# EAGLE board MyQ GDO (EAGLE 9.6.2), part 1 of 2
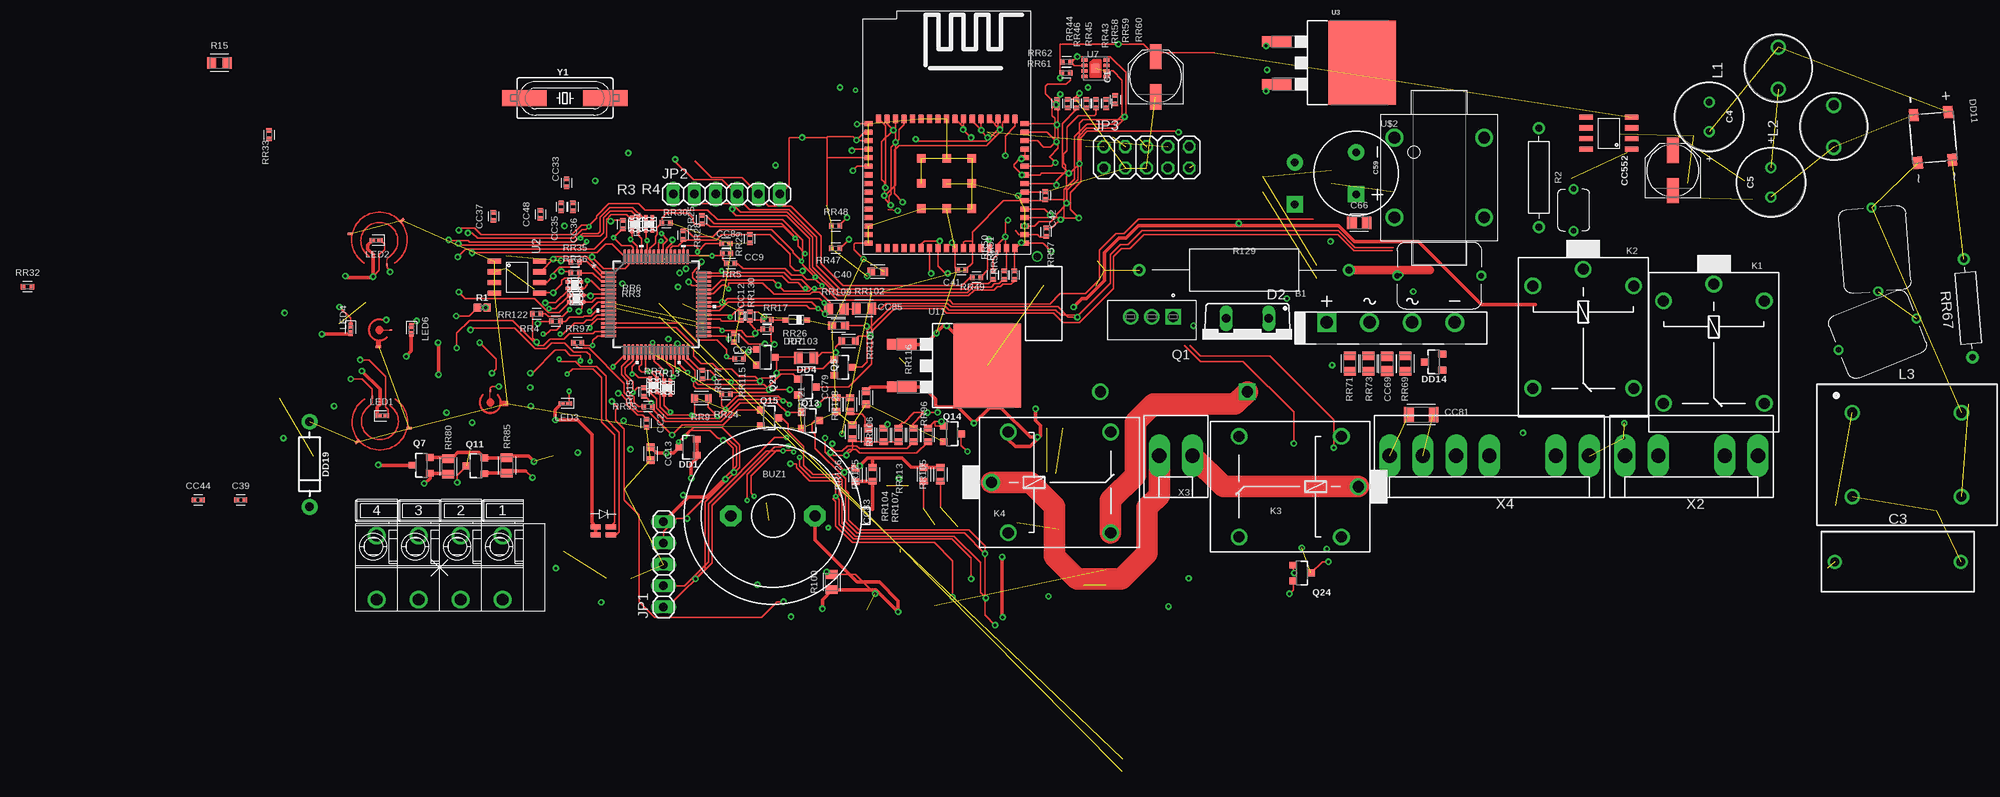
[diagram p0: board, top side]
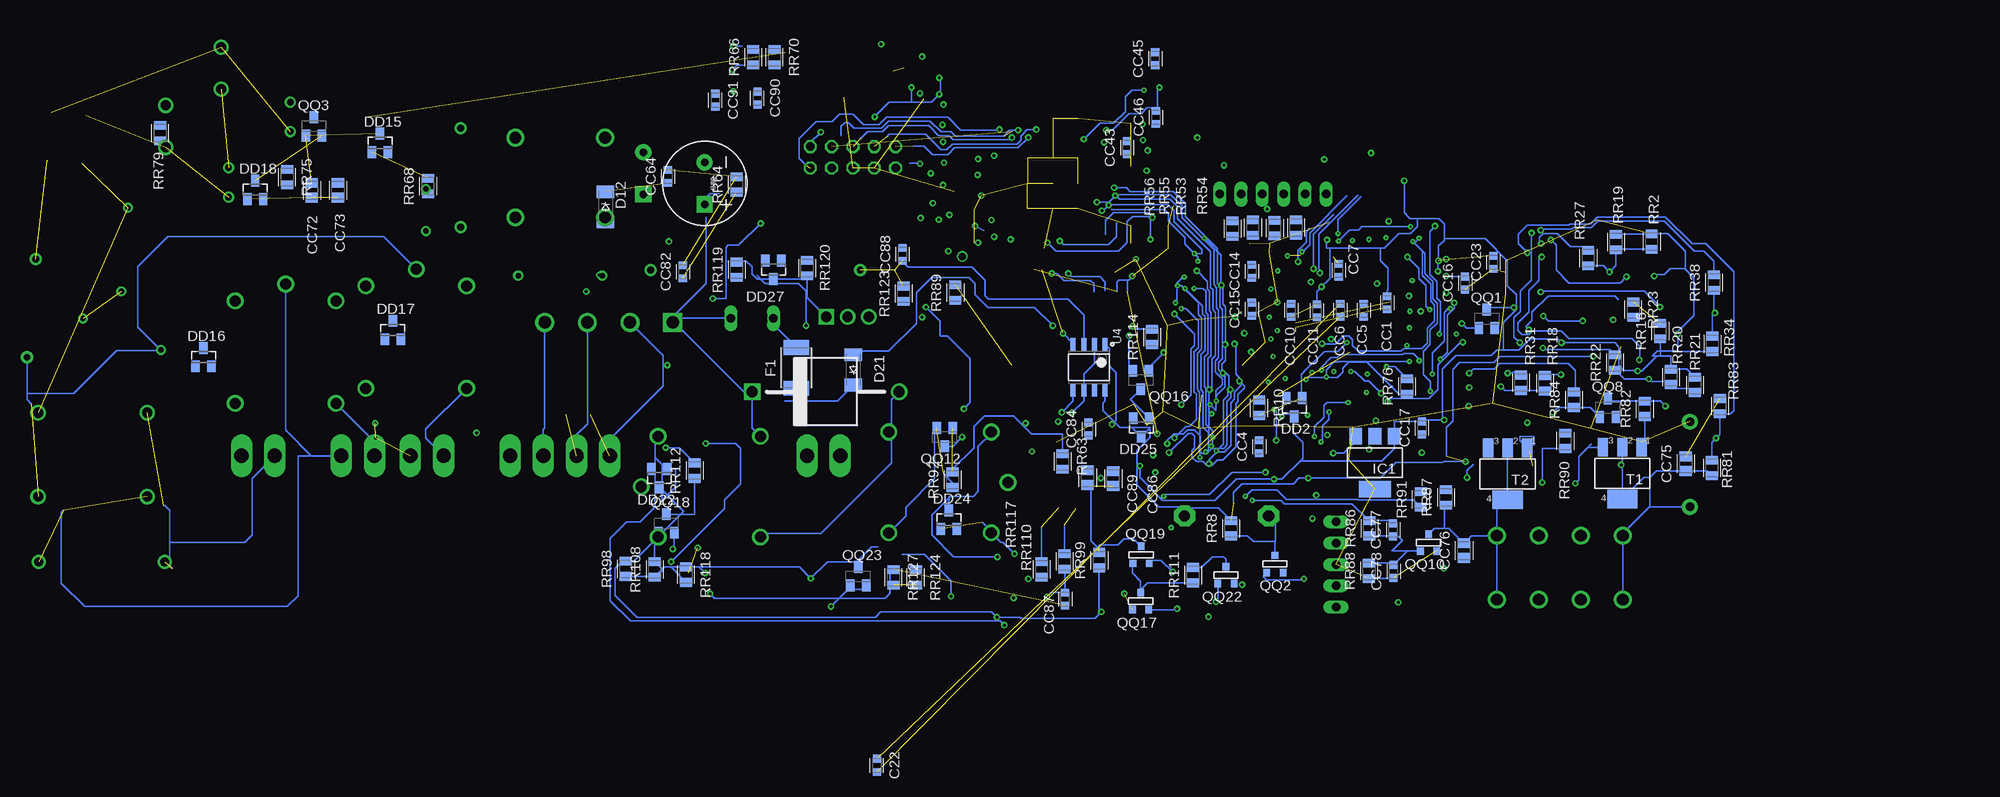
[diagram p1: board, bottom side, seen from below]

No outline drawn. Coordinates in mm, seen from the top.
Copper layers (1*16): Top 0.035mm / dielectric 1.5mm / Bottom 0.035mm
Design rules "default": minimum track width 6mil, minimum drill 0.35mm, track to track 6mil, track to pad 6mil, pad to pad 6mil, via to via 6mil, smd to smd 6mil, copper to edge 40mil, drill to drill 6mil, minimum pad ring 10mil, minimum via ring 8mil, stop-mask expansion 4mil, vias tented up to drill 0mil, thermal gap 10mil
Net classes: 0 default: width 0.152 mm

## Footprints (pad centres in the part's own frame; a part is rotated, then mirrored left to right if it is on the bottom)
GBU1002 = drill 1.499 square: + -7.62,0 | drill 1.499: - 7.62,0; AC1 -2.54,0; AC2 2.54,0
F/EE21P = drill 1.321 pad 2.54 octagon: 1 -5.004,0; 2 5.004,0
PANASONIC_D = smd 3 x 1.4: + 2.4,0; - -2.4,0
WCAP-FTBP_15X18X7X13(PXLXWXH) = drill 1.1: 1 -7.5,0; 2 7.5,0
WCAP-ATG8_8X16(DXL) = drill 0.8: 1 1.75,0; 2 -1.75,0
CAPC1608X85 = smd 0.921 x 0.97: 1 -0.775,0; 2 0.775,0
CAPC1005X60 = smd 0.56 x 0.629: 1 -0.485,0; 2 0.485,0
CPOL-RADIAL-5MM-10MM = drill 0.9 pad 1.93 square: + 2.5,0 | drill 0.9 pad 1.93: - -2.5,0
CAPC2012X110 = smd 1.165 x 1.465: 1 -0.875,0; 2 0.875,0
THROUGH-HOLE_10MM = drill 0.65: P$1 -5,0; P$2 5,0
THROUGH-HOLE_5MM = drill 0.65: P$1 -2.5,0; P$2 2.5,0
CAPC3216X135 = smd 1.165 x 1.815: 1 -1.475,0; 2 1.475,0
0805_SMD_BICOLOR_LED = smd 1.2 x 0.6: P$1 0.9,0.475; P$2 -0.9,0.475; P$3 -0.9,-0.475; P$4 0.9,-0.475
DO220S = drill 1.016 long: A 2.54,-2.54; C -2.54,-2.54
SOD-123_MINI-SMA = smd 1.5 x 2.1: A 1.8,0; C -1.8,0
SOT23-3 = smd 0.8 x 0.9: 1 -0.95,-1; 2 0.95,-1; 3 0,1.1
SOT23 = smd 1 x 1.4: 1 -0.95,-1.1; 2 0.95,-1.1; 3 0,1.1
SOD323_ST = smd 0.8 x 0.6: A 1.25,0; C -1.25,0
SMD = smd 1.5 x 1.1: 1 -2.86,2.05; 2 2.86,2.05; 3 2.86,-2.05; 4 -2.86,-2.05
DIODE-1N4001-KIT = drill 1.016 pad 1.88: A -5.08,0; C 5.08,0
1.2_AXIAL_WIDE = drill 1.321: P$1 -8.75,0 | drill 1.321 square: P$2 8.75,0
FUSC4632X160 = smd 1.73 x 3.05: 1 -2.415,0; 2 2.415,0
SOT223 = smd 1.5 x 2: 1 -2.3,-3.15; 2 0,-3.15; 3 2.3,-3.15 | smd 3.8 x 2: 4 0,3.15
5.0MM_4TERM = drill 1.4: P$0_1 -7.5,3.81; P$0_2 -2.5,3.81; P$0_3 2.5,3.81; P$0_4 7.5,3.81; P$1_1 -7.5,-3.81; P$1_2 -2.5,-3.81; P$1_3 2.5,-3.81; P$1_4 7.5,-3.81
1X05 = drill 1.016 long: 1 -5.08,0; 2 -2.54,0; 3 0,0; 4 2.54,0; 5 5.08,0
1X06 = drill 1.016 long: 1 -6.35,0; 2 -3.81,0; 3 -1.27,0; 4 1.27,0; 5 3.81,0; 6 6.35,0
2X05 = drill 1.016 octagon: 1 -5.08,-1.27; 2 -5.08,1.27; 3 -2.54,-1.27; 4 -2.54,1.27; 5 0,-1.27; 6 0,1.27; 7 2.54,-1.27; 8 2.54,1.27; 9 5.08,-1.27; 10 5.08,1.27
HF3FA = drill 1.321: 1 -7.525,-6; 2 -7.525,6; O 4.675,6; P -9.525,0; S 4.676,-6
WE-TIS_8075 = drill 1.2: 1 -2.5,0; 2 2.5,0
WE-FC_UT20V = drill 1.2: 1 -6.5,5; 2 -6.5,-5; 3 6.5,-5; 4 6.5,5
LEDC1005X25N_FLAT-R = smd 0.7 x 0.5: A 0.45,0; C -0.45,0
TO-220 = drill 1.23 pad 1.85: D 2.54,0; S 5.08,0 | drill 1.23 pad 1.85 square: G 0,0
SOT23-BEC = smd 1 x 1.4: B -0.95,-1.1; C 0,1.1; E 0.95,-1.1
SOT-23 = smd 0.787 x 0.889: 1 0.025,-1.016; 2 -0.94,1.016; 3 0.991,1.016
0402 = smd 0.85 x 0.9: 1 -0.58,0; 2 0.58,0
RESAD1176W63L850D250B = drill 0.83 pad 1.43: 1 -5.88,0; 2 5.88,0
SMD_ARRAY_1.6X2.0 = smd 0.43 x 0.65: P$1 -0.385,-0.725; P$2 -0.385,0.725; P$3 0.385,0.725; P$4 0.385,-0.725
RESC2012X65 = smd 1.031 x 1.42: 1 -0.919,0; 2 0.919,0
RESAD1176W63L850D250B' = drill 0.83 pad 1.43: 1 -12.5,0; 2 12.5,0
RESC1005X40 = smd 0.535 x 0.644: 1 -0.507,0; 2 0.507,0
RESC1608X60 = smd 0.799 x 0.974: 1 -0.815,0; 2 0.815,0
CAP_TOUCH_PAD = smd 0.152 x 0.305: P$1 -0.9,2.9 | smd 0.61 x 0.305 rotated 45: P$2 -2.7,-2.4 | smd 0.61 x 0.305: P$3 3.5,-0.8
CAP_TOUCH_PAD2 = smd 0.152 x 0.305: P$1 0,1.397 | smd 0.305 x 0.61: P$2 1.999,-0.114
SOT223' = smd 1.219 x 2.235: 1 -2.311,-3.099; 2 0,-3.099; 3 2.311,-3.099 | smd 3.6 x 2.2: 4 0,3.099
TQFP64_10X10MC_MCH-M = smd 1.778 x 0.279: 1 -5.664,3.75; 2 -5.664,3.25; 3 -5.664,2.75; 4 -5.664,2.25; 5 -5.664,1.75; 6 -5.664,1.25; 7 -5.664,0.75; 8 -5.664,0.25; 9 -5.664,-0.25; 10 -5.664,-0.75; 11 -5.664,-1.25; 12 -5.664,-1.75; 13 -5.664,-2.25; 14 -5.664,-2.75; 15 -5.664,-3.25; 16 -5.664,-3.75; 33 5.664,-3.75; 34 5.664,-3.25; 35 5.664,-2.75; 36 5.664,-2.25; 37 5.664,-1.75; 38 5.664,-1.25; 39 5.664,-0.75; 40 5.664,-0.25; 41 5.664,0.25; 42 5.664,0.75; 43 5.664,1.25; 44 5.664,1.75; 45 5.664,2.25; 46 5.664,2.75; 47 5.664,3.25; 48 5.664,3.75 | smd 0.279 x 1.778: 17 -3.75,-5.664; 18 -3.25,-5.664; 19 -2.75,-5.664; 20 -2.25,-5.664; 21 -1.75,-5.664; 22 -1.25,-5.664; 23 -0.75,-5.664; 24 -0.25,-5.664; 25 0.25,-5.664; 26 0.75,-5.664; 27 1.25,-5.664; 28 1.75,-5.664; 29 2.25,-5.664; 30 2.75,-5.664; 31 3.25,-5.664; 32 3.75,-5.664; 49 3.75,5.664; 50 3.25,5.664; 51 2.75,5.664; 52 2.25,5.664; 53 1.75,5.664; 54 1.25,5.664; 55 0.75,5.664; 56 0.25,5.664; 57 -0.25,5.664; 58 -0.75,5.664; 59 -1.25,5.664; 60 -1.75,5.664; 61 -2.25,5.664; 62 -2.75,5.664; 63 -3.25,5.664; 64 -3.75,5.664
SOIC-8 = smd 0.61 x 1.6: P$1 -1.905,-2.7; P$2 -0.635,-2.7; P$3 0.635,-2.7; P$4 1.905,-2.7; P$5 1.905,2.7; P$6 0.635,2.7; P$7 -0.635,2.7; P$8 -1.905,2.7
TO-263/D2PAK = smd 1.25 x 3.5: 1 -2.54,-7.045; 3 2.54,-7.045 | smd 10 x 8: 2 0,3.125
ON_SEMICONDUCTOR_LM258D_0 = smd 1.52 x 0.6: 1 -2.74,1.905; 2 -2.74,0.635; 3 -2.74,-0.635; 4 -2.74,-1.905; 5 2.74,-1.905; 6 2.74,-0.635; 7 2.74,0.635; 8 2.74,1.905
TDFN8-3X3MM = smd 0.7 x 0.4: 1 -1.3,0.975; 2 -1.3,0.325; 3 -1.3,-0.325; 4 -1.3,-0.975; 5 1.3,-0.975; 6 1.3,-0.325; 7 1.3,0.325; 8 1.3,0.975 | smd 1 x 1: TH 0,0
CHAMBERLAIN_HBW8522 = smd 0.6 x 1: P$1 8.128,1.6; P$2 7.112,1.6; P$3 6.096,1.6; P$4 5.08,1.6; P$5 4.064,1.6; P$6 3.048,1.6; P$7 2.032,1.6; P$8 1.016,1.6; P$9 0,1.6; P$10 -1.016,1.6; P$11 -2.032,1.6; P$12 -3.048,1.6; P$13 -4.064,1.6; P$14 -5.08,1.6; P$15 -6.096,1.6; P$16 -7.112,1.6; P$17 -8.128,1.6; P$33 -8.128,-13.8; P$34 -7.112,-13.8; P$35 -6.096,-13.8; P$36 -5.08,-13.8; P$37 -4.064,-13.8; P$38 -3.048,-13.8; P$39 -2.032,-13.8; P$40 -1.016,-13.8; P$41 0,-13.8; P$42 1.016,-13.8; P$43 2.032,-13.8; P$44 3.048,-13.8; P$45 4.064,-13.8; P$46 5.08,-13.8; P$47 6.096,-13.8; P$48 7.112,-13.8; P$49 8.128,-13.8 | smd 1 x 0.6: P$18 -9.3,1.012; P$19 -9.3,-0.004; P$20 -9.3,-1.02; P$21 -9.3,-2.036; P$22 -9.3,-3.052; P$23 -9.3,-4.068; P$24 -9.3,-5.084; P$25 -9.3,-6.1; P$26 -9.3,-7.116; P$27 -9.3,-8.132; P$28 -9.3,-9.148; P$29 -9.3,-10.164; P$30 -9.3,-11.18; P$31 -9.3,-12.196; P$32 -9.3,-13.212; P$50 9.3,-13.212; P$51 9.3,-12.196; P$52 9.3,-11.18; P$53 9.3,-10.164; P$54 9.3,-9.148; P$55 9.3,-8.132; P$56 9.3,-7.116; P$57 9.3,-6.1; P$58 9.3,-5.084; P$59 9.3,-4.068; P$60 9.3,-3.052; P$61 9.3,-2.036; P$62 9.3,-1.02; P$63 9.3,-0.004; P$64 9.3,1.012 | smd 1.016 x 1.016: P$65 3,-3.1; P$66 0,-3.1; P$67 -3,-3.1; P$68 3,-6.1; P$69 0,-6.1; P$70 -3,-6.1; P$71 3,-9.1; P$72 0,-9.1; P$73 -3,-9.1
TRANSFORMER = drill 1.4: 1 -5.35,4.75; 2 -5.35,-4.75; 3 5.35,-4.75; 4 5.35,4.75
KK-156-5-MOD = drill 1.7 pad 2.184 long: 1 -7.92,0; 2 -3.96,0; 4 3.96,0; 5 7.92,0
KK-156-2 = drill 1.7 pad 2.184 long: 1 -1.98,0; 2 1.98,0
KK-156-7-MOD = drill 1.7 pad 2.184 long: 1 -11.88,0; 2 -7.92,0; 4 0,0; 5 3.96,0; 6 7.92,0; 7 11.88,0
HC49UP = smd 5.334 x 1.93: 1 -4.826,0; 2 4.826,0

## Placement (x,y rotation side)
B1  [GBU1002]  92.52,92.27 0 top
BUZ1  F/EE21P  [F/EE21P]  18.92,69.22 0 top
C1  100uF  [PANASONIC_D]  64.52,121.54 90 top
C3  330 nF  [WCAP-FTBP_15X18X7X13(PXLXWXH)]  152.91,63.75 0 top
C4  680 µF  [WCAP-ATG8_8X16(DXL)]  130.43,116.78 270 top
C5  680 µF  [WCAP-ATG8_8X16(DXL)]  137.79,108.97 90 top
C22  [CAPC1608X85]  60.58,39.5 270 bottom
C39  [CAPC1005X60]  -44.45,71.12 0 top
C40  [CAPC1608X85]  31.43,98.3 0 top
C41  [CAPC1005X60]  41.4,98.55 0 top
C42  [CAPC1005X60]  51.37,107.38 90 top
C59  1mF  [CPOL-RADIAL-5MM-10MM]  88.39,110.05 270 top
C66  [CAPC2012X110]  88.77,104.14 0 top
C80  1mF  [CPOL-RADIAL-5MM-10MM]  81.09,108.84 270 bottom
CC1  [CAPC1608X85]  -0.19,94.61 90 bottom
CC2  [CAPC1005X60]  3.87,80.26 270 top
CC3  [CAPC1005X60]  14.29,90.42 270 top
CC4  [CAPC1608X85]  15.05,77.47 90 bottom
CC5  [CAPC1608X85]  2.6,93.73 90 bottom
CC6  [CAPC1608X85]  5.4,93.73 90 bottom
CC7  [CAPC1608X85]  5.59,98.49 90 bottom
CC8  [CAPC1005X60]  13.34,101.66 0 top
CC9  [CAPC1005X60]  13.4,100.52 0 top
CC10  [CAPC1608X85]  11.24,93.73 90 bottom
CC11  [CAPC1608X85]  8.19,93.66 90 bottom
CC12  [CAPC1005X60]  15.11,93.03 270 top
CC13  [CAPC1608X85]  4.38,76.64 270 top
CC14  [CAPC1608X85]  15.94,98.36 90 bottom
CC15  [CAPC1608X85]  15.94,93.85 90 bottom
CC16  [CAPC1608X85]  -9.46,96.96 90 bottom
CC17  [CAPC1608X85]  -4.32,79.69 90 bottom
CC23  [CAPC1608X85]  -12.83,99.44 90 bottom
CC33  [CAPC1005X60]  -5.65,108.9 90 top
CC35  [CAPC1005X60]  -6.29,106.05 90 top
CC36  [CAPC1005X60]  -4.89,106.05 90 top
CC37  [CAPC1005X60]  -14.35,104.9 90 top
CC43  [CAPC1608X85]  30.8,113.09 90 bottom
CC44  [CAPC1005X60]  -49.53,71.12 0 top
CC45  [CAPC1608X85]  27.43,123.7 90 bottom
CC46  [CAPC1608X85]  27.37,116.71 90 bottom
CC47  CAPACITOR_HIGH_VOLTAGE_CERAMIC10MM_LEAD_SPACING  [THROUGH-HOLE_10MM]  150.18,100.97 94.5 top
CC48  [CAPC1005X60]  -8.76,105.16 90 top
CC52  CAPACITOR_HIGH_VOLTAGE_CERAMIC5.0MM_LEAD_SPACING  [THROUGH-HOLE_5MM]  114.3,105.66 90 top
CC53  CAPACITOR_HIGH_VOLTAGE_CERAMIC10MM_LEAD_SPACING  [THROUGH-HOLE_10MM]  150.5,90.87 22 top
CC64  [CAPC1608X85]  85.47,109.66 90 bottom
CC69  [CAPC2012X110]  92.08,87.38 90 top
CC70  CAPACITOR_HIGH_VOLTAGE_CERAMIC10MM_LEAD_SPACING  [THROUGH-HOLE_10MM]  98.3,97.85 0 top
CC72  [CAPC2012X110]  127.89,108.01 90 bottom
CC73  [CAPC2012X110]  124.78,108.01 90 bottom
CC75  [CAPC2012X110]  -35.75,75.44 90 bottom
CC76  [CAPC2012X110]  -9.33,65.09 90 bottom
CC77  [CAPC1608X85]  -0.89,67.56 90 bottom
CC78  [CAPC1608X85]  -0.95,62.61 90 bottom
CC79  [CAPC1608X85]  30.04,83.31 270 top
CC81  [CAPC3216X135]  96.14,81.28 0 top
CC82  [CAPC1608X85]  83.69,98.3 90 bottom
CC83  [CAPC1608X85]  30.29,78.87 270 top
CC84  [CAPC1608X85]  35.37,79.57 90 bottom
CC85  [CAPC1608X85]  26.73,91.88 0 top
CC86  [CAPC2012X110]  32.45,73.66 90 bottom
CC87  [CAPC1608X85]  38.16,59.31 90 bottom
CC88  [CAPC1608X85]  57.53,100.39 90 bottom
CC89  [CAPC2012X110]  35.5,73.79 90 bottom
CC90  [CAPC1608X85]  74.8,119 270 bottom
CC91  [CAPC1608X85]  79.82,118.75 270 bottom
CC552  100uF  [PANASONIC_D]  126.11,110.36 90 top
D1  LED_0805_BICOLOR  [0805_SMD_BICOLOR_LED]  -1.27,67.44 180 top
D2  [DO220S]  75.44,90.23 180 top
D12  CGRM4003-G  [SOD-123_MINI-SMA]  92.9,106.05 270 bottom
D21  CGRM4003-G  [SOD-123_MINI-SMA]  63.37,86.61 90 bottom
DD1  [SOT23-3]  8.89,77.41 90 top
DD2  BAS40  [SOT23]  10.86,82.17 180 bottom
DD4  [SOT23-3]  22.92,84.58 270 top
DD7  [SOD323_ST]  21.72,92.58 180 top
DD11  [SMD]  157.1,114.3 275 top
DD14  [SOT23-3]  97.66,87.57 90 top
DD15  BAS40  [SOT23]  119.76,113.67 0 bottom
DD16  BAS40  [SOT23]  140.78,88.14 0 bottom
DD17  BAS40  [SOT23]  118.24,91.38 0 bottom
DD18  BAS40  [SOT23]  134.62,108.08 0 bottom
DD19  1A/50V/1.1V  [DIODE-1N4001-KIT]  -36.26,75.37 270 top
DD22  BAS40  [SOT23]  86.49,73.72 180 bottom
DD24  BAS40  [SOT23]  52.01,68.77 0 bottom
DD25  BAS40  [SOT23]  29.08,79.76 180 bottom
DD26  600V_DIODE  [1.2_AXIAL_WIDE]  66.67,84.01 180 bottom
DD27  BAS40  [SOT23]  72.9,98.55 180 bottom
F1  MF-MSMF-STYLE2_1  [FUSC4632X160]  70.17,86.87 90 bottom
IC1  LD117AS18TR  [SOT223]  1.27,75.56 180 bottom
J1  HSTA_5.0MM_VERT-4TERM  [5.0MM_4TERM]  -20.76,63.06 180 top
JP1  PINHD-1X5  [1X05]  5.91,63.44 90 top
JP2  PINHD-1X6  [1X06]  13.4,107.57 0 top
JP3  [2X05]  63.44,111.95 0 top
K1  HF3FA  [HF3FA]  131,87.31 270 top
K2  HF3FA  [HF3FA]  115.44,89.09 270 top
K3  HF3FA  [HF3FA]  79.12,72.71 180 top
K4  HF3FA  [HF3FA]  54.48,73.22 0 top
L1  3300uH  [WE-TIS_8075]  138.68,122.56 90 top
L2  3300uH  [WE-TIS_8075]  145.29,115.63 90 top
L3  2.7mH  [WE-FC_UT20V]  153.99,76.52 0 top
LED1  LED_RED  [LEDC1005X25N_FLAT-R]  -27.56,81.15 0 top
LED2  LED_RED  [LEDC1005X25N_FLAT-R]  -28.32,102.04 180 top
LED3  LED_RED  [LEDC1005X25N_FLAT-R]  -5.78,82.61 180 top
LED4  LED_RED  [LEDC1005X25N_FLAT-R]  -31.37,91.44 270 top
LED6  LED_RED  [LEDC1005X25N_FLAT-R]  -24.13,91.38 270 top
Q1  IRF520NPBF  [TO-220]  66.61,92.96 180 top
Q5  [SOT23-3]  27.24,86.93 270 top
Q7  K2F Marking  [SOT23-3]  -22.92,75.25 90 top
Q11  K2F Marking  [SOT23-3]  -16.45,75.18 90 top
Q13  [SOT23-3]  23.37,80.58 270 top
Q14  [SOT23-3]  40.26,78.99 270 top
Q15  [SOT23-3]  18.48,80.9 270 top
Q21  [SOT23-3]  18.03,88.14 270 top
Q24  [SOT23-3]  81.92,62.42 270 top
QQ1  [SOT23-BEC]  -12.06,92.71 0 bottom
QQ2  PNP_SOT23  [SOT-23]  13.14,63.5 180 bottom
QQ3  [SOT23-BEC]  127.64,115.63 0 bottom
QQ8  [SOT23-BEC]  -26.48,82.11 0 bottom
QQ10  PNP_SOT23  [SOT-23]  -5.14,66.04 180 bottom
QQ12  [SOT23-BEC]  52.51,78.61 180 bottom
QQ16  [SOT23-BEC]  29.15,85.41 180 bottom
QQ17  -NPN  [SOT-23]  29.15,59.05 180 bottom
QQ18  [SOT23-BEC]  85.66,68.33 0 bottom
QQ19  -NPN  [SOT-23]  29.08,64.58 180 bottom
QQ22  PNP_SOT23  [SOT-23]  18.99,62.17 180 bottom
QQ23  [SOT23-BEC]  62.8,62.04 0 bottom
R1  [0402]  -15.68,94.04 0 top
R2  [RESAD1176W63L850D250B]  110.17,109.54 270 top
R3  SMD_RES_ARRAY_X2  [SMD_ARRAY_1.6X2.0]  2.54,103.95 0 top
R4  SMD_RES_ARRAY_X2  [SMD_ARRAY_1.6X2.0]  4.19,104.01 0 top
R15  [RESC2012X65]  -46.99,123.19 0 top
R100  [RESC2012X65]  25.91,61.34 90 top
R129  [RESAD1176W63L850D250B']  75.06,98.49 0 top
RR2  [RESC2012X65]  -31.69,101.92 90 bottom
RR3  SMD_RES_ARRAY_X2  [SMD_ARRAY_1.6X2.0]  -4.51,95.12 270 top
RR4  [RESC1005X40]  -6.92,92.39 0 top
RR5  [RESC1005X40]  13.91,99.31 180 top
RR6  SMD_RES_ARRAY_X2  [SMD_ARRAY_1.6X2.0]  -4.7,96.71 270 top
RR7  SMD_RES_ARRAY_X2  [SMD_ARRAY_1.6X2.0]  4.7,84.77 0 top
RR8  [RESC2012X65]  18.41,67.75 90 bottom
RR9  [RESC1608X60]  10.41,83.25 0 top
RR10  [RESC2012X65]  15.05,82.11 270 bottom
RR11  [RESC1005X40]  1.08,103.95 270 top
RR13  SMD_RES_ARRAY_X2  [SMD_ARRAY_1.6X2.0]  6.35,84.52 0 top
RR15  [RESC1005X40]  3.56,84.01 90 top
RR16  [RESC2012X65]  -32.7,91.25 90 bottom
RR17  [RESC1005X40]  18.22,92.58 0 top
RR18  [RESC2012X65]  -18.99,85.03 90 bottom
RR19  [RESC2012X65]  -27.43,101.85 90 bottom
RR20  [RESC2012X65]  -33.97,85.79 90 bottom
RR21  [RESC2012X65]  -36.83,84.84 90 bottom
RR22  [RESC2012X65]  -27.3,87.5 90 bottom
RR23  [RESC2012X65]  -29.53,93.79 270 bottom
RR24  [RESC1005X40]  13.34,83.69 0 top
RR25  330R  [RESC1005X40]  10.48,104.52 270 top
RR26  [RESC1005X40]  18.22,91.44 0 top
RR27  [RESC2012X65]  -24.13,99.95 90 bottom
RR28  330R  [RESC1005X40]  8.26,102.68 270 top
RR29  [RESC1005X40]  16.19,102.23 270 top
RR30  83K  [RESC1005X40]  6.22,104.14 0 top
RR31  [RESC2012X65]  -16.13,85.09 90 bottom
RR32  [RESC1005X40]  -69.85,96.52 0 top
RR33  [RESC1005X40]  -41.08,114.62 90 top
RR34  [RESC2012X65]  -38.93,89.73 90 bottom
RR35  [RESC1005X40]  -4.64,99.5 0 top
RR36  [RESC1005X40]  -4.64,98.17 0 top
RR38  [RESC2012X65]  -39.12,97.03 90 bottom
RR43  [RESC1005X40]  56.26,118.36 90 top
RR44  [RESC1005X40]  52.77,118.36 90 top
RR45  [RESC1005X40]  55.05,118.36 90 top
RR46  [RESC1005X40]  54.04,118.36 90 top
RR47  [RESC1005X40]  26.42,101.09 0 top
RR48  [RESC1005X40]  26.42,103.76 0 top
RR49  [RESC1005X40]  43.18,97.66 0 top
RR50  [RESC1005X40]  45.15,97.92 270 top
RR51  [RESC1005X40]  46.48,97.92 270 top
RR52  [RESC1005X40]  47.69,97.92 270 top
RR53  [RESC2012X65]  13.21,103.5 90 bottom
RR54  [RESC2012X65]  10.67,103.57 90 bottom
RR55  [RESC2012X65]  15.81,103.57 90 bottom
RR56  [RESC2012X65]  18.22,103.44 90 bottom
RR57  [RESC1005X40]  51.5,103.06 270 top
RR58  [RESC1005X40]  57.4,118.36 90 top
RR59  [RESC1005X40]  58.61,118.36 90 top
RR60  [RESC1005X40]  59.69,118.81 90 top
RR61  [RESC1005X40]  53.85,121.98 0 top
RR62  [RESC1005X40]  53.91,123.32 0 top
RR63  [RESC2012X65]  38.48,75.69 90 bottom
RR64  [RESC2012X65]  77.28,108.71 90 bottom
RR66  [RESC2012X65]  75.31,123.89 90 bottom
RR67  [RESAD1176W63L850D250B]  161.29,93.98 95 top
RR68  [RESC2012X65]  114.05,108.52 90 bottom
RR69  [RESC2012X65]  94.23,87.38 90 top
RR70  [RESC2012X65]  72.77,123.89 270 bottom
RR71  [RESC2012X65]  87.63,87.38 90 top
RR73  [RESC2012X65]  89.85,87.38 90 top
RR75  [RESC2012X65]  130.81,109.6 270 bottom
RR76  [RESC2012X65]  -2.54,84.65 90 bottom
RR77  [RESC1005X40]  10.54,86.04 90 top
RR79  [RESC2012X65]  145.92,114.81 270 bottom
RR80  [RESC2012X65]  -19.75,75.12 90 top
RR81  [RESC2012X65]  -38.86,74.93 90 bottom
RR82  [RESC2012X65]  -30.86,81.98 90 bottom
RR83  [RESC2012X65]  -39.81,82.3 90 bottom
RR84  [RESC2012X65]  -22.42,83.06 90 bottom
RR85  [RESC2012X65]  -12.76,75.25 90 top
RR86  [RESC2012X65]  1.91,67.75 90 bottom
RR87  [RESC2012X65]  -7.18,71.44 90 bottom
RR88  [RESC2012X65]  1.97,62.67 90 bottom
RR89  [RESC2012X65]  51.24,95.82 90 bottom
RR90  [RESC2012X65]  -21.4,78.17 90 bottom
RR91  [RESC2012X65]  -4.19,71.18 90 bottom
RR92  [RESC2012X65]  51.56,73.53 90 bottom
RR95  [RESC1005X40]  4.06,82.23 0 top
RR96  [RESC1608X60]  37.4,78.87 270 top
RR97  [RESC1005X40]  -4.32,89.85 0 top
RR98  [RESC2012X65]  90.49,62.93 90 bottom
RR99  [RESC2012X65]  34.1,63.94 90 bottom
RR101  [RESC1608X60]  27.94,90.04 0 top
RR102  [RESC2012X65]  29.78,93.92 0 top
RR103  [RESC2012X65]  22.86,88.01 0 top
RR104  [RESC1608X60]  36.89,74.17 90 top
RR105  [RESC1608X60]  38.86,74.17 90 top
RR106  [RESC1608X60]  28.38,79.25 270 top
RR107  [RESC1608X60]  32.13,78.87 270 top
RR108  [RESC2012X65]  87.06,62.87 90 bottom
RR109  [RESC2012X65]  26.48,93.85 0 top
RR110  [RESC2012X65]  40.96,62.87 90 bottom
RR111  [RESC2012X65]  22.92,62.17 90 bottom
RR112  [RESC2012X65]  82.3,74.61 90 bottom
RR113  [RESC1608X60]  33.91,78.87 270 top
RR114  [RESC2012X65]  27.81,90.55 90 bottom
RR115  [RESC1005X40]  14.92,87.95 0 top
RR116  [RESC1608X60]  35.69,78.87 270 top
RR117  [RESC2012X65]  38.23,63.82 90 bottom
RR118  [RESC2012X65]  83.31,62.23 270 bottom
RR119  [RESC2012X65]  77.28,98.55 90 bottom
RR120  [RESC2012X65]  68.9,98.74 90 bottom
RR121  [RESC1608X60]  28.13,82.49 270 top
RR122  [RESC1005X40]  -9.21,93.28 0 top
RR123  [RESC2012X65]  57.4,95.69 90 bottom
RR124  [RESC2012X65]  55.94,61.91 270 bottom
RR125  [RESC1608X60]  30.8,74.17 90 top
RR126  [RESC1608X60]  28.77,74.1 90 top
RR127  [RESC2012X65]  58.61,61.91 270 bottom
RR128  [RESC1608X60]  26.48,82.49 270 top
RR130  [RESC1005X40]  16.19,93.03 270 top
SW1  CAP_TOUCH_PADBIG  [CAP_TOUCH_PAD]  -27.88,80.45 0 top
SW2  CAP_TOUCH_PADSMALL  [CAP_TOUCH_PAD2]  -27.94,91.38 270 top
SW4  CAP_TOUCH_PADSMALL  [CAP_TOUCH_PAD2]  -14.73,82.74 0 top
SW5  CAP_TOUCH_PADBIG  [CAP_TOUCH_PAD]  -27.94,102.04 180 top
T1  [SOT223']  -28.19,74.3 180 bottom
T2  [SOT223']  -14.54,74.23 180 bottom
U1  PIC18F67J11-I/PTTQFP64_10X10MC_MCH-M  [TQFP64_10X10MC_MCH-M]  5.02,94.42 0 top
U2  MICROCHIP_24LC16B-I-ST  [SOIC-8]  -11.56,97.66 270 top
U3  LM317D2  [TO-263/D2PAK]  85.98,123.19 270 top
U4  ON_SEMICONDUCTOR_LM258DON_SEMICONDUCTOR_LM258D_0_0  [ON_SEMICONDUCTOR_LM258D_0]  35.31,86.93 270 bottom
U7  [TDFN8-3X3MM]  57.34,122.56 0 top
U11  LM317D2  [TO-263/D2PAK]  41.34,87.12 270 top
U$1  CHAMBERLAIN_HBW8522  [CHAMBERLAIN_HBW8522]  39.62,114.94 0 top
U$2  [TRANSFORMER]  98.3,109.54 0 top
U$3  MP2307SOIC-8  [SOIC-8]  118.49,114.81 90 top
X2  [KK-156-5-MOD]  128.33,76.39 180 top
X3  [KK-156-2]  66.93,76.39 180 top
X4  [KK-156-7-MOD]  104.27,76.39 180 top
Y1  8MHz  [HC49UP]  -5.84,119 0 top

## Library data of the parts
B1 CC47 CC52 CC53 CC70 D1 DD26 QQ2 QQ10 QQ17 QQ19 QQ22 R3 R4 R129 RR3 RR6 RR7 RR13 SW1 SW2 SW4 SW5 U2 U3 U11 U$1 U$3 X2 X4 = CustomParts-Josh
BUZ1 = buzzer; OC_FARNELL: unknown; OC_NEWARK: unknown
C1 CC552 = SparkFun-Capacitors; PROD_ID: CAP-12547
C3 = Wurth_Capacitors_WCAP-FTBP; DATASHEET-URL: https://www.we-online.com/catalog/datasheet/890283325008CS.pdf; DF1: 0.1%@1kHz; DF2: 0.15%@10kHz; DF3: 0.92%@100kHz; H: 13mm; L: 18mm; OPERATING-TEMPERATURE: -40 °C up to +105 °C; PART-NUMBER: 890283325008CS; RATE-OF-VOLTAGE-RISE: 140V/us; RISO: 30000 MOhm; TECHNICAL-REFERENCE: MPPP015334J400DCPP45004; VR: 400V(DC); W: 7mm
C4 C5 = Wurth_Capacitors_WCAP-ATG8; DATASHEET-URL: https://www.we-online.com/catalog/datasheet/860010374014.pdf; DF: 16%; DIAMETER: 8mm; I-LEAK: 108.8uA; I-RIPPLE: 640mA; L: 16mm; OPERATING-TEMPERATURE: -40 °C up to +85 °C; PART-NUMBER: 860010374014; PITCH: 3.5mm; TECHNICAL-REFERENCE: ATBE160681M016DSPA7B000; VR: 16V(DC)
C22 C39-C42 C66 CC1-CC17 CC23 CC33 CC35-CC37 CC43-CC46 CC48 CC64 CC69 CC72 CC73 CC75-CC79 CC81-CC91 = Capacitor; CATEGORY: Capacitor
C59 C80 = SparkFun-Capacitors; PROD_ID: CAP-09538
D2 D12 D21 DD2 DD7 DD15-DD18 DD22 DD24 DD25 DD27 = diode
DD1 DD4 DD14 Q5 Q7 Q11 Q13-Q15 Q21 Q24 = SparkFun-DiscreteSemi; PROD_ID: TRANS-00830
DD11 = Bridge Rectifiers; CREATED_BY: PCBLayout.com; DIGIKEY_PARTNO: CD-MBL106STR-ND; MANUFACTURER: Bourns Inc.; MPN: CD-MBL106S; PACKAGE: SMD
DD19 = SparkFun-DiscreteSemi; PROD_ID: DIO-09176
F1 = Fuse; CATEGORY: FUSE; DESCRIPTION: PTC Resettable Fuses; MANUFACTURER: BOURNS; MPN: MF-MSMF; OPERATING_TEMPERATURE: -40 °C to +85 °C; PART_STATUS: Active; ROHS_COMPLIANCE: RoHS Compliant; SERIES: MF-MSMF; SUB-CATEGORY: Resettable; TYPE: PTC
IC1 = v-reg
J1 = con-conexit
JP1 JP2 = Connector; CATEGORY: CONNECTOR; SUB-CATEGORY: PIN-HEADER
JP3 = pinhead
K1-K4 = CustomParts-Josh; OC_FARNELL: unknown; OC_NEWARK: unknown
L1 L2 = Wurth_Power Magnetics_WE-TIS; DATASHEET-URL: https://katalog.we-online.com/pbs/datasheet/744731332.pdf; FRES: 1MHz; IR: 0.18A; ISAT: 0.15A; PART-NUMBER: 744731332; RDC-MAX: 8Ohm; RDC-TYP: 6.2Ohm
L3 = Wurth_EMC Components_WE-FC; DATASHEET-URL: https://www.we-online.com/catalog/datasheet/7448640410.pdf; IR: 1.2A; MOUNT: THT; PART-NUMBER: 7448640410; RDC: 0.187mOhm; VR: 250 V (AC); VT: 2000 V (AC)
LED1-LED4 LED6 = LED; CATEGORY: LED; COLOR: RED; DESCRIPTION: CHIP LED FLAT; SUB-CATEGORY: CHIP; TYPE: FLAT_TOP
Q1 = Transistor; CREATED_BY: PCBLayout.com; DIGIKEY_PART_NUMBER: IRF520NPBF-ND; MANUFACTURER: Infineon Technologies; MPN: IRF520NPBF; PACKAGE: TO-220
QQ1 QQ3 QQ8 QQ12 QQ16 QQ18 QQ23 = transistor
R1 = SparkFun-Resistors
R2 R15 R100 RR2 RR4 RR5 RR8-RR11 RR15-RR36 RR38 RR43-RR64 RR66-RR71 RR73 RR75-RR77 RR79-RR92 RR95-RR99 RR101-RR128 RR130 = Resistor; CATEGORY: Resistor; SUB-CATEGORY: Fixed
T1 T2 = zetex; MPN: DJT4030P-13; OC_FARNELL: 1710675; OC_NEWARK: 25R4489
U1 = CustomParts-Josh; COPYRIGHT: Copyright (C) 2022 Ultra Librarian. All rights reserved.; DIGI-KEY_PART_NUMBER_1: MCC-2425-ND; DIGI-KEY_PART_NUMBER_2: MCC-2452-ND; DIGI-KEY_PART_NUMBER_3: MCC-3243-ND; DIGI-KEY_PART_NUMBER_4: PIC18F67J11-I/PT-CRL-ND; DIGI-KEY_PART_NUMBER_5: PIC18F67J11-I/PT-ND; MANUFACTURER_PART_NUMBER: PIC18F67J11-I/PT; MFR_NAME: Microchip
U4 = CustomParts-Josh; CIIVA_IDS: 3237540; COMPONENT_LINK_1_DESCRIPTION: Manufacturer URL; COMPONENT_LINK_1_URL: http://www.onsemi.com/; COMPONENT_LINK_3_DESCRIPTION: Package Specification; COMPONENT_LINK_3_URL: http://www.onsemi.com/pub_link/Collateral/751-07.PDF; DATASHEET: http://www.onsemi.cn/pub_link/Collateral/LM358-D.PDF; DATASHEET_VERSION: Rev. 27; FOOTPRINT_VARIANT_NAME_0: Manufacturer Recommended; IMPORTED: yes; IMPORTED_FROM: vault; IMPORT_TS: 1521844966; MF: On Semiconductor; MOUNTING_TECHNOLOGY: Surface Mount; MPN: LM258D; PACKAGE: SOIC-8-751-07; PACKAGE_DESCRIPTION: 8-Pin Small Outline Integrated Circuit, Body 4.9 x 3.9 mm, Pitch 1.27 mm; PACKAGE_VERSION: Rev. AK, 02/2011; PACKING: Tube; PREFIX: U; RELEASE_DATE: 1415352448; ROHS: No; VAULT_GUID: 10DAAB04-9B6F-4D40-9F2F-93FF7C8855E5; VAULT_REVISION: 729A8281-7C41-40E7-8273-41176E92BBEB; VCC_MAX_V: 32; VCC_MIN_V: 3
U7 = maxim
U$2 = SparkFun-Coils
X3 = con-molex; MF: MOLEX; OC_FARNELL: unknown; OC_NEWARK: unknown
Y1 = SparkFun-Clocks; PROD_ID: XTAL-11706

## Nets
BUZZER_PIN1: BUZ1.1 QQ2.1 RR8.1
D21_TO_F1: D21.C F1.1
GND: C1.- C40.2 C41.1 C42.2 CC2.2 CC3.2 CC8.2 CC9.2 CC12.1 CC13.2 CC16.1 CC23.1 CC78.1 CC79.2 CC85.1 DD4.2 DD7.C DD19.A IC1.4 JP1.3 JP3.3 JP3.5 Q5.2 Q13.2 Q14.2 Q15.2 Q21.2 QQ10.2 RR29.2 RR30.2 RR45.2 RR46.2 RR88.1 RR106.1 RR128.2 RR130.1 SW1.P$2 SW1.P$3 SW2.P$2 SW4.P$2 SW5.P$2 SW5.P$3 U1.41 U2.P$1 U2.P$2 U2.P$3 U2.P$4 U4.4 U$1.P$9 U$1.P$10 U$1.P$11 U$1.P$12 U$1.P$18 U$1.P$21 U$1.P$23 U$1.P$30 U$1.P$32 U$1.P$42 U$1.P$50 U$1.P$54 U$1.P$56 U$1.P$65 U$1.P$66 U$1.P$67 U$1.P$68 U$1.P$69 U$1.P$70 U$1.P$71 U$1.P$72 U$1.P$73
GPIO6: JP3.6 U$1.P$5
GPIO7: JP3.4 U$1.P$8
GPIO8: JP3.2 U$1.P$7
GPIO9: JP3.8 U$1.P$6
GPIO10: JP3.9 U$1.P$4
IN: U$3.P$2
J8_PIN1: RR105.1 RR110.2
J8_PIN2: RR104.1 RR117.2
J8_PIN3: CC86.1 QQ19.1 RR99.2
J8_PIN5: RR125.1 RR126.1
JP1_1: JP1.1 RR25.2 RR30.1 U1.58
JP1_2: JP1.2 RR28.2 RR29.1 U1.53
JP1_4: JP1.4 RR24.1 U1.23
JTAG_PWR: JP3.1
K1_PIN$1: K1.1
K1_PIN$2: K1.2
K4_PIN1: DD24.1 K4.1 Q15.3
K4_PIN-S: B1.+ D2.C DD26.P$2 K3.S K4.S QQ12.E RR92.1
LED1_K: LED1.A R3.P$2
LED6_K: LED6.C R1.1
MCU_ICSP_CLK_TAP: RR25.1 U$1.P$15
MCU_ICSP_DATA_TAP: RR28.1 U$1.P$14
MCU_PIN31: RR116.2 U1.31
N$1: RR47.2 U$1.P$41
N$2: QQ16.E RR101.2 RR102.2
N$3: U7.6 U7.TH
N$5: DD27.3 Q1.G RR119.2 RR120.1
N$7: RR52.1 U$1.P$49
N$8: RR51.1 U$1.P$48
N$9: RR50.1 U$1.P$47
N$10: R129.2
N$11: RR48.2
N$12: RR49.2 U$1.P$46
N$14: CC77.2 RR86.2 U1.47
N$15: CC13.1 DD1.3 IC1.3
N$16: RR4.2 U1.10
N$17: B1.- X4.5
N$18: DD26.P$1 K3.O K4.O
N$19: K2.S X4.2
N$21: K4.P X3.2
N$22: C66.1
N$23: RR5.1
N$24: CC9.1 RR5.2 U1.49
N$26: QQ17.3 QQ19.2 R100.2
N$28: DD27.1
N$30: RR62.2 U7.2 U$1.P$52
N$31: RR52.2
N$32: JP2.2 RR51.2
N$33: JP2.4 RR50.2
N$34: U$1.P$61
N$35: JP2.5 RR49.1
N$36: U1.1 U2.P$7
N$40: U1.27
N$41: RR84.2 U1.29
N$42: U1.30
N$43: RR77.2 U1.32
N$44: U$1.P$53
N$45: U1.24
N$46: CC2.1 RR13.P$2 U1.22
N$47: RR7.P$3 U1.21
N$48: RR7.P$2 U1.20
N$49: RR15.2 U1.19
N$50: RR95.1 U1.18
N$51: RR76.2 U1.17
N$52: CC79.1 QQ12.C U11.3
N$53: CC83.2 RR106.2 RR107.2 RR113.2
N$55: Q14.3
N$56: RR107.1 U4.1
N$58: QQ8.E
N$59: K3.P X3.1
N$60: B1.AC2 CC81.2 X4.6
N$61: D21.A RR89.2 U11.1 U11.2
N$63: U$1.P$38
N$65: DD25.1 QQ16.C
N$66: JP3.10 RR57.1
N$67: RR7.P$4 U$1.P$17
N$68: RR7.P$1 U$1.P$16
N$69: RR102.1 RR109.2
N$70: CC3.1 U1.33
N$71: RR26.1 U1.9 U1.34 U1.35
N$72: U1.28
N$73: DD7.A RR17.2 RR26.2
N$74: Q15.1 RR97.1
N$75: RR24.2 U$1.P$2
N$77: RR38.2 U1.40
N$78: CC85.2 RR114.2
N$79: QQ16.B RR101.1 RR103.2
N$80: Q21.3 RR103.1
N$83: C5.2 DD11.4 L2.1
N$84: U$1.P$1
N$86: CC75.1 DD19.C J1.P$0_4 J1.P$1_4 RR81.1 T1.2 T1.4
N$88: RR81.2 RR83.1 U1.64
N$89: C80.+
N$90: C80.-
N$91: C59.-
N$92: C59.+
N$93: C4.2
N$94: C4.1 DD11.1 L1.2
N$95: CC47.P$2 DD11.3 L3.4
N$96: DD11.2 RR67.2
N$100: C3.2 K1.P L3.2 X2.4
N$101: C3.1 L3.1 X2.2
N$102: QQ12.B RR63.2 RR92.2
N$103: CC53.P$1 K2.P L3.3 RR67.1
N$104: DD14.3
N$105: DD14.2
N$106: DD14.1
N$107: RR69.2
N$108: RR69.1
N$109: CC69.2
N$110: CC69.1
N$111: RR73.1
N$112: RR73.2
N$113: RR71.2
N$114: RR71.1
N$116: LED3.C R3.P$3
N$117: RR97.2 U1.16
N$118: QQ1.B RR4.1
N$119: U1.12
N$120: X4.1
N$121: L2.2
N$124: U$1.P$3
N$125: RR113.1 U4.2 U4.6
N$126: RR116.1 U4.5
N$127: Q5.3
N$129: RR121.1 RR128.1 U1.38
N$132: Q14.1 RR96.1
N$133: CC83.1 RR121.2
N$134: RR126.2 U1.39
N$141: U$1.P$60
N$144: DD22.1 K3.1 Q13.3
N$146: Q24.3
N$150: K1.S X2.5
N$152: K1.O
N$153: U1.11
N$158: CC87.2 RR13.P$1 RR117.1
N$159: R15.1
N$160: U1.46
N$162: QQ1.C R1.2
N$168: Q13.1 RR95.2
N$169: B1.AC1 CC81.1 X4.7
N$171: Q5.1 RR77.1
N$172: QQ2.3 RR15.1
N$173: DD4.1 RR76.1
N$174: RR9.1
N$175: D1.P$2 RR6.P$4
N$176: D1.P$3 RR3.P$1
N$177: RR122.2 U1.63
N$178: U1.8 U1.36
N$179: RR3.P$3 U1.7
N$180: RR3.P$2 U1.6
N$181: RR6.P$3 U1.5
N$182: RR36.2 U1.3 U2.P$5
N$183: U1.45
N$188: RR11.2 U1.62
N$189: R3.P$1 U1.61
N$190: R3.P$4 U1.60
N$191: R4.P$1 U1.59
N$192: U1.55
N$196: CC8.1 U1.50
N$198: RR11.1
N$205: LED2.C R4.P$2
N$208: X2.1
N$209: CC12.2 RR17.1 RR130.2 U1.37
N$211: U1.26
N$212: C5.1 L1.1
N$213: RR91.1 U1.48
N$214: U1.51
N$215: U1.44
N$216: RR109.1 U1.43
N$217: CC16.2 RR35.2 U1.2 U2.P$6
N$218: D2.A F1.2
N$219: Q21.1 RR115.2
N$221: DD4.3
N$222: RR115.1 U1.13
N$229: U$1.P$40
N$230: U$1.P$39
N$232: CC47.P$1 CC53.P$2
N$233: U1.52
N$234: RR44.1 U$1.P$59
N$235: U1.4
N$236: U2.P$8
N$241: RR57.2 U$1.P$51
N$242: U$1.P$64
N$243: U$1.P$63
N$244: U$1.P$62
N$245: RR58.1 U$1.P$57
N$246: RR45.1 U$1.P$58
N$247: RR44.2
N$248: JP2.1
N$256: U$1.P$45
N$265: C22.1 CC6.1
N$266: U1.42
N$267: RR96.2 U1.14
N$289: RR112.2
N$293: Q24.2
N$298: RR108.1 RR118.2
N$304: C22.2 CC6.2
N$306: RR34.2 RR38.1
N$307: QQ8.C RR82.2
N$308: RR82.1 T1.1
N$309: QQ8.B RR84.1
N$319: CC75.2 RR83.2
N$326: DD2.1 RR10.2
N$327: DD2.3
N$332: CC76.2 J1.P$0_1 J1.P$1_1 QQ10.1 RR87.1 T2.2 T2.4
N$333: T2.3
N$336: CC77.1 CC78.2 QQ10.3 RR86.1 RR88.2
N$337: QQ22.2
N$341: QQ17.1 QQ19.3 RR111.1
N$343: QQ22.1 RR111.2
N$358: RR124.2 RR127.2
N$359: RR124.1
N$360: CC87.1 RR127.1
N$361: CC82.1 RR64.1
N$362: CC64.2 CC82.2 RR64.2
N$364: Q24.1 RR118.1
N$366: QQ18.E
N$367: QQ23.E
N$372: QQ18.B RR98.1 RR108.2
N$376: QQ18.C RR112.1
N$380: D12.A
N$381: DD17.1
N$382: DD17.3
N$386: DD16.1
N$387: DD16.3
N$392: RR68.1
N$393: DD15.1 RR68.2
N$394: QQ3.C
N$395: CC72.2 DD15.3 QQ3.B
N$396: DD18.3 QQ3.E
N$397: CC72.1 CC73.1 DD18.1
N$398: CC64.1 D12.C
N$401: RR79.2
N$402: RR79.1
N$404: Q1.S
N$406: CC73.2
N$409: RR119.1
N$417: Q1.D
N$419: CC88.1 R129.1 RR123.2 U4.3
N$423: RR16.2 RR23.1
N$425: RR23.2
N$431: CC15.1
N$432: CC14.1
R122_REAL: QQ22.3 RR122.1
RR80_A: Q7.1 RR80.1 T1.3
RR85_A: Q11.1 RR85.1
SS: U$3.P$8
SW1_TOUCH: RR20.1 RR21.1 RR22.1 SW1.P$1
SW2_TOUCH: SW2.P$1
SW3_DOWN: RR2.1 RR19.1 RR27.1 SW5.P$1
SW4_TOUCH: RR18.1 RR31.1 SW4.P$1
TO_DD1: BUZ1.2 DD1.1 DD1.2 DD22.3 DD24.3 DD25.3 K3.2 K4.2 LED6.A Q7.2 Q11.2 QQ17.2 R100.1 RR8.2 RR80.2 RR85.2 RR98.2 RR99.1 U4.8
TO_LED4: LED4.C RR3.P$4
TO_Q7: Q7.3
TO_Q11: Q11.3 RR90.1 T2.1
TO_SW1: RR22.2 U1.15
TO_SW3: RR27.2
TO_SW4: RR31.2 U1.56
VCC_1: CC1.2 CC7.2 CC10.1 CC11.2 CC17.2 CC23.2 D1.P$1 D1.P$4 IC1.1 JP1.5 LED1.C LED2.A LED3.A LED4.A RR2.2 RR9.2 RR16.1 RR18.2 RR19.2 RR20.2 RR21.2 RR34.1 RR35.1 RR36.1 RR104.2 RR105.2 RR125.2 U1.54
VCC_2: C1.+ C40.1 C41.2 C42.1 JP2.6 RR47.1 RR48.1 U$1.P$19 U$1.P$20 U$1.P$22 U$1.P$43 U$1.P$44 U$1.P$55 U$3.P$4